# Allegro board 野火_EBF6ULL B1 核心板_PCB封装参考设计_Allegro格式.brd
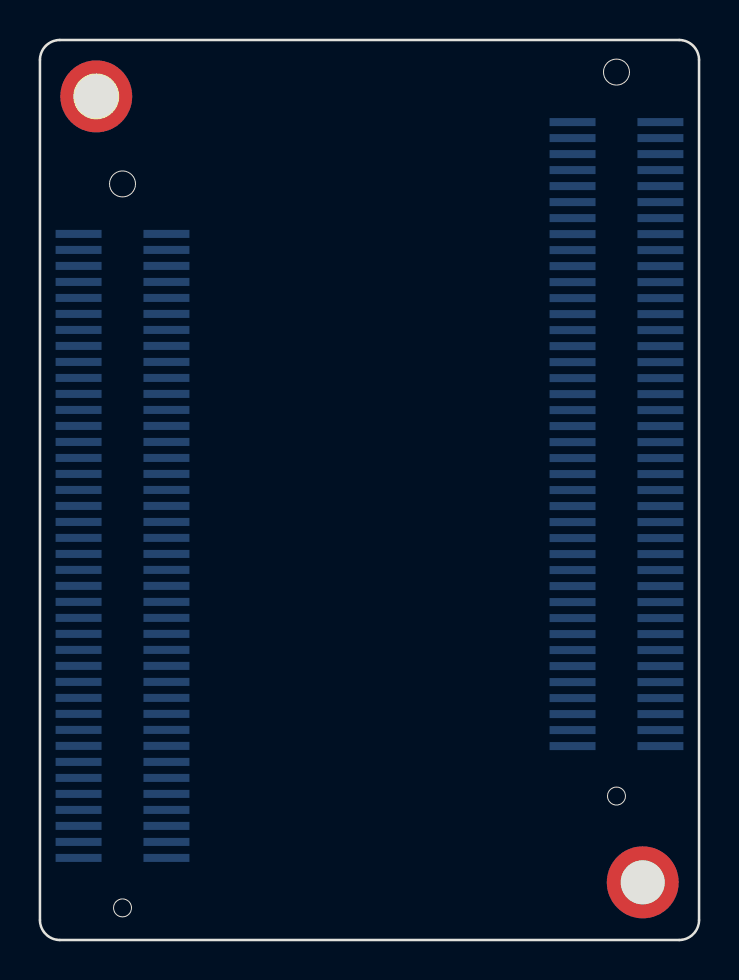
[diagram p0: board, top side]
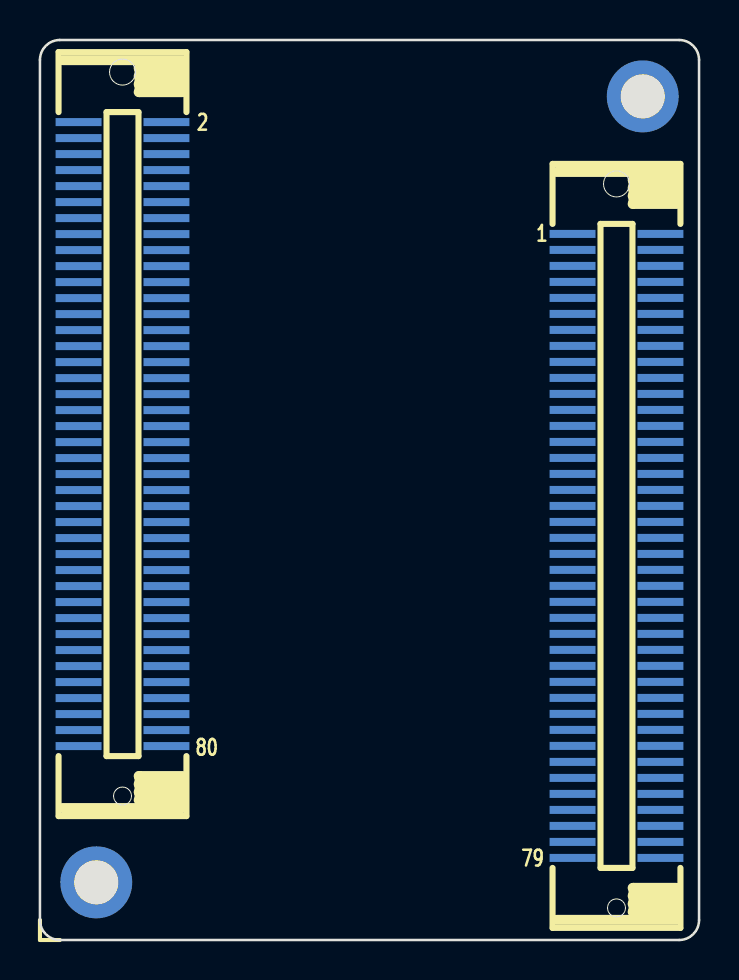
[diagram p1: board, bottom side, seen from below]

Outline 33 x 45 mm; copper layers: TOP, BOTTOM. Coordinates in mm from the lower left corner of the outline.
Outline path: 0,44 arc(0.29,44.71) 1,45 32,45 arc(32.71,44.71) 33,44 33,1 arc(32.71,0.29) 32,0 1,0 arc(0.29,0.29) 0,1 0,44

## Design rules (mm)
constraint set DEFAULT: min track width 0.127
net group USB_OTG1_D: nets USB_OTG1_DN USB_OTG1_DP
net group USB_OTG2_D: nets USB_OTG2_DN USB_OTG2_DP

## Placement (name value [footprint] x y rotation side)
CN1  -  [B2BF-2X40-0P8]  4.13 19.71 180 bottom
CN2  -  [B2BF-2X40-0P8]  28.86 25.3 180 bottom
H1  2.0mm  [T2_5-4]  30.18 2.88 270 top
H2  2.0mm  [T2_5-4]  2.82 42.18 0 top
NOREF  -  []  0 22.5 0 top
NOREF#2  -  []  1.8 42.59 0 top
NOREF#3  -  []  4.13 19.81 0 top
NOREF#4  -  []  16.5 0 90 top
NOREF#5  -  []  30.18 2.88 0 top
NOREF#6  -  []  30.44 0 90 top

## Library data of the parts
CN1 CN2 = B2BF_2X40_A
H1 H2 = SPACER_0

## Footprints (pads in the part's own frame, mm; a bottom-side part is the same pattern mirrored in y, then rotated)
B2BF-2X40-0P8
  rect 2.301x0.401 smd: 1(-2.2,15.601) 2(2.2,15.601) 3(-2.2,14.801) 4(2.2,14.801) 5(-2.2,14.001) 6(2.2,14.001) 7(-2.2,13.2) 8(2.2,13.2) 9(-2.2,12.4) 10(2.2,12.4) 11(-2.2,11.6) 12(2.2,11.6) 13(-2.2,10.8) 14(2.2,10.8) 15(-2.2,10) 16(2.2,10) 17(-2.2,9.2) 18(2.2,9.2) 19(-2.2,8.4) 20(2.2,8.4) 21(-2.2,7.6) 22(2.2,7.6) 23(-2.2,6.8) 24(2.2,6.8) 25(-2.2,6) 26(2.2,6) 27(-2.2,5.199) 28(2.2,5.199) 29(-2.2,4.399) 30(2.2,4.399) 31(-2.2,3.599) 32(2.2,3.599) 33(-2.2,2.799) 34(2.2,2.799) 35(-2.2,1.999) 36(2.2,1.999) 37(-2.2,1.199) 38(2.2,1.199) 39(-2.2,0.401) 40(2.2,0.401) 41(-2.2,-0.401) 42(2.2,-0.401) 43(-2.2,-1.199) 44(2.2,-1.199) 45(-2.2,-1.999) 46(2.2,-1.999) 47(-2.2,-2.799) 48(2.2,-2.799) 49(-2.2,-3.599) 50(2.2,-3.599) 51(-2.2,-4.399) 52(2.2,-4.399) 53(-2.2,-5.199) 54(2.2,-5.199) 55(-2.2,-6) 56(2.2,-6) 57(-2.2,-6.8) 58(2.2,-6.8) 59(-2.2,-7.6) 60(2.2,-7.6) 61(-2.2,-8.4) 62(2.2,-8.4) 63(-2.2,-9.2) 64(2.2,-9.2) 65(-2.2,-10) 66(2.2,-10) 67(-2.2,-10.8) 68(2.2,-10.8) 69(-2.2,-11.6) 70(2.2,-11.6) 71(-2.2,-12.4) 72(2.2,-12.4) 73(-2.2,-13.2) 74(2.2,-13.2) 75(-2.2,-14.001) 76(2.2,-14.001) 77(-2.2,-14.801) 78(2.2,-14.801) 79(-2.2,-15.601) 80(2.2,-15.601)
T2_5-4
  round 3.6 hole 2.2: 1(0,0)

## Nets
GND: CN1.1 CN1.2 CN1.11 CN1.12 CN1.21 CN1.22 CN1.31 CN1.32 CN1.34 CN1.39 CN1.40 CN1.49 CN1.50 CN1.75 CN1.76 CN2.1 CN2.2 CN2.11 CN2.12 CN2.21 CN2.22 CN2.29 CN2.30 CN2.43 CN2.44 CN2.55 CN2.56 CN2.59 CN2.60 CN2.62 CN2.63 CN2.64 CN2.71 CN2.72 CN2.79 CN2.80 H1.1(NC_1) H2.1(NC_1)
VCC_SYS: CN1.77 CN1.78 CN1.79 CN1.80
VDD_COIN_3V: CN2.61
BOOT_MODE0: CN1.69
BOOT_MODE1: CN1.70
CLK1_N: CN2.57
CLK1_P: CN2.58
CSI_DATA0: CN2.35
CSI_DATA1: CN2.36
CSI_DATA2: CN2.37
CSI_DATA3: CN2.38
CSI_DATA4: CN2.39
CSI_DATA5: CN2.40
CSI_DATA6: CN2.41
CSI_DATA7: CN2.42
CSI_HSYNC: CN2.34
CSI_MCLK: CN2.31
CSI_PIXCLK: CN2.32
CSI_VSYNC: CN2.33
ENET1_CRS_DV: CN2.10
ENET1_RXD0: CN2.7
ENET1_RXD1: CN2.8
ENET1_RXER: CN2.9
ENET1_TX_CLK: CN2.6
ENET1_TXD0: CN2.3
ENET1_TXD1: CN2.4
ENET1_TXEN: CN2.5
ENET2_CRS_DV: CN2.20
ENET2_RXD0: CN2.17
ENET2_RXD1: CN2.18
ENET2_RXER: CN2.19
ENET2_TX_CLK: CN2.16
ENET2_TXD0: CN2.13
ENET2_TXD1: CN2.14
ENET2_TXEN: CN2.15
GPIO_0: CN2.45
GPIO_1: CN2.46
GPIO_2: CN2.47
GPIO_3: CN2.48
GPIO_4: CN2.49
GPIO_5: CN2.50
GPIO_6: CN2.51
GPIO_7: CN2.52
GPIO_8: CN2.53
GPIO_9: CN2.54
LCD_DATA0: CN1.29
LCD_DATA1: CN1.30
LCD_DATA2: CN1.27
LCD_DATA3: CN1.28
LCD_DATA4: CN1.25
LCD_DATA5: CN1.26
LCD_DATA6: CN1.23
LCD_DATA7: CN1.24
LCD_DATA8: CN1.19
LCD_DATA9: CN1.20
LCD_DATA10: CN1.17
LCD_DATA11: CN1.18
LCD_DATA12: CN1.15
LCD_DATA13: CN1.16
LCD_DATA14: CN1.13
LCD_DATA15: CN1.14
LCD_DATA16: CN1.9
LCD_DATA17: CN1.10
LCD_DATA18: CN1.7
LCD_DATA19: CN1.8
LCD_DATA20: CN1.5
LCD_DATA21: CN1.6
LCD_DATA22: CN1.3
LCD_DATA23: CN1.4
LCD_DE: CN1.38
LCD_HSYNC: CN1.35
LCD_PCLK: CN1.37
LCD_RST: CN1.33
LCD_VSYNC: CN1.36
ONOFF: CN1.74
PMIC_ON_REQ: CN1.72
PMIC_STBY_REQ: CN1.71
POR_B: CN1.73
SAI2_BCLK: CN2.25
SAI2_MCLK: CN2.24
SAI2_RXD: CN2.23
SAI2_SYNC: CN2.26
SAI2_TXD: CN2.27
SD1_CLK: CN2.78
SD1_CMD: CN2.77
SD1_DATA0: CN2.73
SD1_DATA1: CN2.74
SD1_DATA2: CN2.75
SD1_DATA3: CN2.76
SNVS_TAMPER0: CN1.67
SNVS_TAMPER1: CN1.68
SNVS_TAMPER2: CN1.65
SNVS_TAMPER3: CN1.66
SNVS_TAMPER4: CN1.63
SNVS_TAMPER5: CN1.64
SNVS_TAMPER6: CN1.61
SNVS_TAMPER7: CN1.62
SNVS_TAMPER8: CN1.59
SNVS_TAMPER9: CN1.60
SPDIF_TX: CN2.28
UART1_CTS: CN1.56
UART1_RTS: CN1.55
UART1_RXD: CN1.58
UART1_TXD: CN1.57
UART2_CTS: CN1.52
UART2_RTS: CN1.51
UART2_RXD: CN1.54
UART2_TXD: CN1.53
UART3_CTS: CN1.46
UART3_RTS: CN1.45
UART3_RXD: CN1.48
UART3_TXD: CN1.47
UART4_RXD: CN1.44
UART4_TXD: CN1.43
UART5_RXD: CN1.42
UART5_TXD: CN1.41
USB_OTG1_DN: CN2.67
USB_OTG1_DP: CN2.65
USB_OTG1_VBUS: CN2.69
USB_OTG2_DN: CN2.68
USB_OTG2_DP: CN2.66
USB_OTG2_VBUS: CN2.70

## Text on the board
Ref Des/Silkscreen Bottom: 1 | 79 | 2 | 80
